# EAGLE board FuseBox.ECU_R3 (EAGLE 6.5.0)
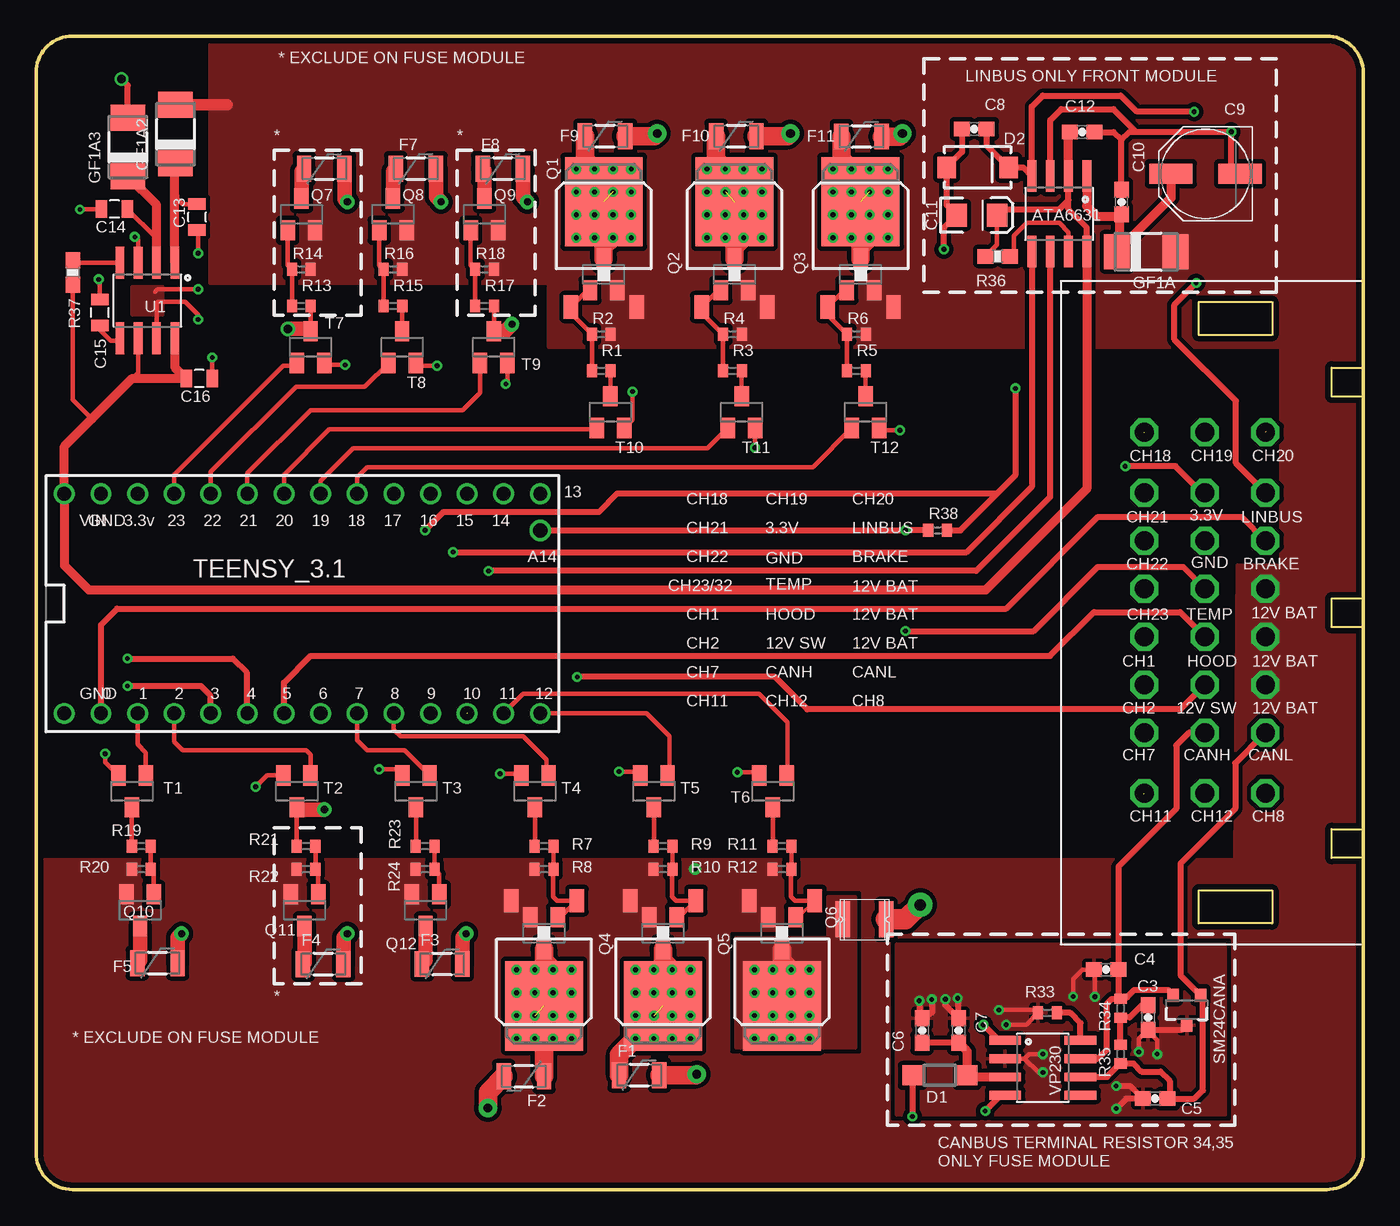
[diagram p0: board, top side]
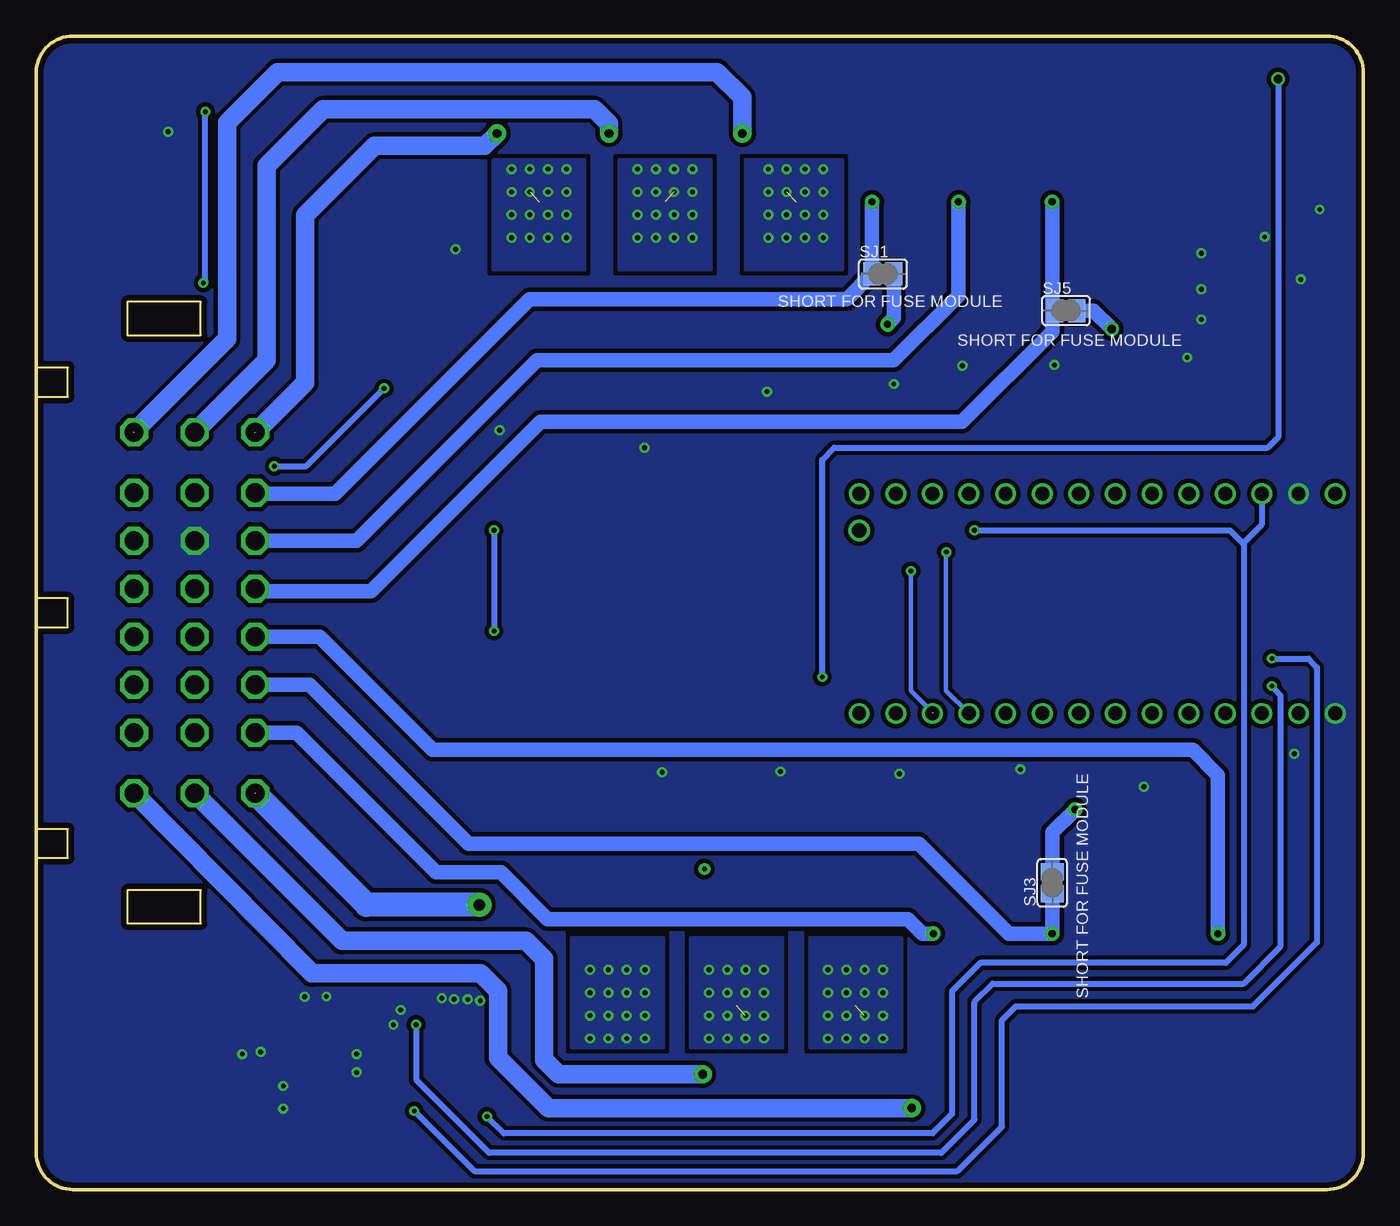
[diagram p1: board, bottom side, seen from below]

Size 92.09 x 80 mm. Coordinates in mm from the lower left corner, seen from the top.
Outline: 2.54,0 89.53,0 arc90 92.08,2.54 92.08,77.46 arc90 89.53,80 2.54,80 arc90 0,77.46 0,2.54 arc90 2.54,0
Copper layers (1*16): Top 0.0356mm / dielectric 1.5011mm / Bottom 0.0356mm
Design rules "oshpark-2layer": minimum track width 6mil, minimum drill 13mil, track to track 6mil, track to pad 6mil, pad to pad 6mil, via to via 6mil, smd to smd 6mil, copper to edge 15mil, drill to drill 6mil, minimum pad ring 7mil, minimum via ring 7mil, stop-mask expansion 2.5mil, vias tented up to drill 0mil, thermal gap 10mil
Net classes: 0 default: width 0.203 mm; 1 vcc: width 0.254 mm

## Footprints (pad centres in the part's own frame; a part is rotated, then mirrored left to right if it is on the bottom)
S08 = smd 0.61 x 2.21: 1 -3.175,-2.616; 2 -1.905,-2.616; 3 -0.635,-2.616; 4 0.635,-2.616; 5 0.635,2.616; 6 -0.635,2.616; 7 -1.905,2.616; 8 -3.175,2.616
0603-CAP = smd 1.1 x 1: 1 -0.85,0; 2 0.85,0
PANASONIC_D = smd 3 x 1.4: + 2.4,0; - -2.4,0
EIA3216 = smd 1.4 x 1.6: A 1.4,0; C -1.4,0
0805 = smd 0.8 x 1.2: 1 -0.9,0; 2 0.9,0
SOD123 = smd 1.4 x 1.4: A 1.9,0; C -1.9,0
SMA-DIODE = smd 1.27 x 1.47: A -2.15,0; C 2.15,0
PTC-1206 = smd 1 x 1.8: 1 -1.4,0; 2 1.4,0
DO-214AC = smd 1.8 x 2.4: A 2.025,0; C -2.025,0
D-PAK_TO252AA = smd 1 x 1.6: 1 -2.28,-4.8; 3 2.28,-4.8 | smd 5.4 x 6.2: 4 0,2.5
SOT23 = smd 1 x 1.4: 1 -0.95,-1.1; 2 0.95,-1.1; 3 0,1.1
R0402 = smd 0.7 x 0.9: 1 -0.65,0; 2 0.65,0
0603-RES = smd 1.1 x 1: 1 -0.85,0; 2 0.85,0
SJ = smd 1.168 x 1.6: 1 -0.762,0; 2 0.762,0
SOT23-3 = smd 0.8 x 0.9: 1 -0.95,-1; 2 0.95,-1; 3 0,1.1
TEENSY_3.0-3.2&LC_DIL = drill 0.965: 0 -7.62,13.97; 1 -7.62,11.43; 2 -7.62,8.89; 3 -7.62,6.35; 3.3V 7.62,11.43; 4 -7.62,3.81; 5 -7.62,1.27; 6 -7.62,-1.27; 7 -7.62,-3.81; 8 -7.62,-6.35; 9 -7.62,-8.89; 10 -7.62,-11.43; 11 -7.62,-13.97; 12 -7.62,-16.51; 13 7.62,-16.51; 14/A0 7.62,-13.97; 15/A1 7.62,-11.43; 16/A2 7.62,-8.89; 17/A3 7.62,-6.35; 18/A4 7.62,-3.81; 19/A5 7.62,-1.27; 20/A6 7.62,1.27; 21/A7 7.62,3.81; 22/A8 7.62,6.35; 23/A9 7.62,8.89; AGND 7.62,13.97; GND -7.62,16.51; VIN 7.62,16.51
SO08 = smd 0.61 x 2.21: 1 -1.905,-2.616; 2 -0.635,-2.616; 3 0.635,-2.616; 4 1.905,-2.616; 5 1.905,2.616; 6 0.635,2.616; 7 -0.635,2.616; 8 -1.905,2.616
1210 = smd 1 x 2.5: P$1 -1.5,0; P$2 1.5,0
HCCPHPE24BKA90F = drill 1.3 octagon: P$1 -12.515,-4.2; P$2 -8.325,-4.2; P$3 -4.995,-4.2; P$4 -1.665,-4.2; P$5 1.665,-4.2; P$6 4.995,-4.2; P$7 8.325,-4.2; P$8 12.515,-4.2; P$9 -12.515,0; P$10 -8.325,0; P$11 -4.995,0; P$12 -1.665,0; P$13 1.665,0; P$14 4.995,0; P$15 8.325,0; P$16 12.515,0; P$17 -12.515,4.2; P$18 -8.325,4.2; P$19 -4.995,4.2; P$20 -1.665,4.2; P$21 1.665,4.2; P$22 4.995,4.2; P$23 8.325,4.2; P$24 12.515,4.2

## Placement (x,y rotation side)
ATA6631  ATA6631  [S08]  69.72,67.67 180 top
C3  4.7nf  [0603-CAP]  77.15,11.94 270 top
C4  82pf  [0603-CAP]  74.24,15.26 180 top
C5  82pf  [0603-CAP]  77.65,6.3 0 top
C6  0.1uF  [0603-CAP]  61.47,11.03 270 top
C7  1uF  [0603-CAP]  64.01,11.03 270 top
C8  220pF  [0603-CAP]  65.09,73.56 180 top
C9  22uF 50v  [PANASONIC_D]  81.14,70.44 180 top
C10  100nF  [0603-CAP]  75.3,68.48 90 top
C11  10uF 16V  [EIA3216]  65.28,67.58 0 top
C12  100nF  [0603-CAP]  72.58,73.34 0 top
C13  1uF  [0805]  11.17,67.45 90 top
C14  1uF  [0805]  5.44,68 180 top
C15  1nF  [0805]  4.42,60.83 90 top
C16  4.7uF  [0805]  11.32,56.25 180 top
D1  MBR0520LT  [SOD123]  62.7,7.92 180 top
D2  SMAJ30CAHE3  [SMA-DIODE]  65.33,70.89 0 top
F1  PTCSMD  [PTC-1206]  41.85,7.94 0 top
F2  PTCSMD  [PTC-1206]  33.84,7.85 180 top
F3  PTCSMD  [PTC-1206]  28.18,15.64 0 top
F4  PTCSMD  [PTC-1206]  19.93,15.64 0 top
F5  PTCSMD  [PTC-1206]  8.43,15.71 0 top
F6  PTCSMD  [PTC-1206]  20,70.8 0 top
F7  PTCSMD  [PTC-1206]  26.35,70.8 0 top
F8  PTCSMD  [PTC-1206]  32.38,70.8 0 top
F9  PTCSMD  [PTC-1206]  39.48,73.05 0 top
F10  PTCSMD  [PTC-1206]  48.59,73.05 0 top
F11  PTCSMD  [PTC-1206]  57.27,73.03 0 top
GF1A  1A_50V  [DO-214AC]  77.03,65.04 0 top
GF1A2  1A_50V  [DO-214AC]  9.68,73.2 90 top
GF1A3  1A_50V  [DO-214AC]  6.38,72.3 90 top
Q1  IRFR5305  [D-PAK_TO252AA]  39.39,66.01 0 top
Q2  IRFR5305  [D-PAK_TO252AA]  48.46,66.01 0 top
Q3  IRFR5305  [D-PAK_TO252AA]  57.2,66.01 0 top
Q4  IRFR5305  [D-PAK_TO252AA]  35.24,15.24 180 top
Q5  IRFR5305  [D-PAK_TO252AA]  43.5,15.24 180 top
Q6  IRFR5305  [D-PAK_TO252AA]  51.75,15.24 180 top
Q7  [SOT23]  18.41,67.63 0 top
Q8  [SOT23]  24.77,67.63 0 top
Q9  [SOT23]  31.11,67.63 0 top
Q10  [SOT23]  7.22,19.37 180 top
Q11  [SOT23]  18.62,19.37 180 top
Q12  [SOT23]  27.02,19.37 180 top
Q13  [SOT23]  39.39,63.47 0 top
Q14  [SOT23]  43.5,17.78 180 top
Q15  [SOT23]  48.46,63.47 0 top
Q16  [SOT23]  57.2,63.47 0 top
Q17  [SOT23]  35.24,17.78 180 top
Q18  [SOT23]  51.75,17.78 180 top
R1  10k  [R0402]  39.22,56.78 180 top
R2  100k  [R0402]  39.22,59.32 0 top
R3  10k  [R0402]  48.31,56.78 180 top
R4  100k  [R0402]  48.31,59.32 0 top
R5  10k  [R0402]  56.91,56.78 180 top
R6  100k  [R0402]  56.91,59.32 0 top
R7  10k  [R0402]  35.24,23.81 0 top
R8  100k  [R0402]  35.24,22.23 180 top
R9  10k  [R0402]  43.5,23.81 0 top
R10  100k  [R0402]  43.5,22.23 180 top
R11  10k  [R0402]  51.75,23.81 0 top
R12  100k  [R0402]  51.75,22.23 180 top
R13  10k  [R0402]  18.41,61.28 180 top
R14  100k  [R0402]  18.41,63.82 0 top
R15  10k  [R0402]  24.77,61.28 180 top
R16  100k  [R0402]  24.77,63.82 0 top
R17  10k  [R0402]  31.11,61.28 180 top
R18  100k  [R0402]  31.11,63.82 0 top
R19  10k  [R0402]  7.3,23.81 0 top
R20  100k  [R0402]  7.3,22.23 180 top
R21  10k  [R0402]  18.73,23.81 0 top
R22  100k  [R0402]  18.73,22.23 180 top
R23  10k  [R0402]  26.99,23.81 0 top
R24  100k  [R0402]  26.99,22.23 180 top
R33  100k  [R0402]  70.17,12.25 0 top
R34  60  [R0402]  75.25,12.57 90 top
R35  60  [R0402]  75.25,9.39 90 top
R36  10k  [0603-RES]  66.72,64.72 0 top
R37  10k  [0603-RES]  2.55,63.6 270 top
R38  10k  [R0402]  62.55,45.72 0 top
SJ1  [SJ]  33.34,63.5 0 bottom
SJ3  [SJ]  21.59,21.27 90 bottom
SJ5  [SJ]  20.64,60.96 0 bottom
SM24CANA  SM24CANA-02HTG  [SOT23-3]  79.83,12.48 180 top
T1  LMUN2211LT1G  [SOT23]  6.67,27.62 180 top
T2  LMUN2211LT1G  [SOT23]  18.1,27.62 180 top
T3  LMUN2211LT1G  [SOT23]  26.35,27.62 180 top
T4  LMUN2211LT1G  [SOT23]  34.61,27.62 180 top
T5  LMUN2211LT1G  [SOT23]  42.86,27.62 180 top
T6  LMUN2211LT1G  [SOT23]  51.12,27.62 180 top
T7  LMUN2211LT1G  [SOT23]  19.05,58.42 0 top
T8  LMUN2211LT1G  [SOT23]  25.4,58.42 0 top
T9  LMUN2211LT1G  [SOT23]  31.75,58.42 0 top
T10  LMUN2211LT1G  [SOT23]  39.85,53.92 0 top
T11  LMUN2211LT1G  [SOT23]  48.95,53.92 0 top
T12  LMUN2211LT1G  [SOT23]  57.55,53.92 0 top
TEENSY_3.1  TEENSY_3.1-3.2_DIL  [TEENSY_3.0-3.2&LC_DIL]  18.48,40.64 90 top
U1  MAX16910  [SO08]  7.72,61.65 180 top
U$2  RESETTABLE_1210  [1210]  57.47,18.73 0 top
U$3  HCCPHPE24BKA90F  [HCCPHPE24BKA90F]  81.09,40 90 top
VP230  UP230  [SO08]  69.85,8.44 270 top

## Library data of the parts
ATA6631 = my-library
C3-C10 C12 = SparkFun-Capacitors
C11 C13-C16 R36 R37 = SparkFun
D1 GF1A GF1A2 GF1A3 = diode
D2 SM24CANA = SparkFun-DiscreteSemi
F1-F11 = SparkFun-PowerIC; PROD_ID: RES-11150
Q1-Q6 = transistor-power
Q7-Q18 = semicon-smd-ipc
R1-R24 R33-R35 R38 = resistor
SJ1 SJ3 SJ5 = jumper
T1-T12 = transistor
TEENSY_3.1 = Teensy_3_and_LC_Series_Boards_v1.4
U1 = SparkFun-AnalogIC; PROD_ID: IC-10141
U$2 = Simplex-Fuses
U$3 = FCI_By_element14_Batch_1
VP230 = smd-footprints

## Nets
0: TEENSY_3.1.0 U$3.P$6
1: T1.1 TEENSY_3.1.1
2: T2.1 TEENSY_3.1.2
3: TEENSY_3.1.3 VP230.1
3.3V: D1.A R38.2 TEENSY_3.1.3.3V U$3.P$15
4: TEENSY_3.1.4 VP230.4
5: TEENSY_3.1.5 U$3.P$12
5V: ATA6631.2 ATA6631.8 C11.A C12.1 C16.2 R36.1 R37.2 TEENSY_3.1.VIN U1.6 U1.8
6: TEENSY_3.1.6
7: T3.1 TEENSY_3.1.7
8: T4.1 TEENSY_3.1.8
9: ATA6631.5 TEENSY_3.1.9
10: ATA6631.6 TEENSY_3.1.10
11: T6.1 TEENSY_3.1.11
12: T5.1 TEENSY_3.1.12
12ACC: GF1A3.A U$3.P$11
12V: GF1A2.A GF1A.A Q1.3 Q2.3 Q3.3 Q4.3 Q5.3 Q6.3 Q7.2 Q8.2 Q9.2 Q10.2 Q11.2 Q12.2 Q13.2 Q14.2 Q15.2 Q16.2 Q17.2 Q18.2 R2.2 R4.2 R6.2 R8.2 R10.2 R12.2 R14.2 R16.2 R18.2 R20.2 R22.2 R24.2 U$3.P$3 U$3.P$4 U$3.P$5
13: TEENSY_3.1.13
14: TEENSY_3.1.14/A0
15: TEENSY_3.1.15/A1
16: TEENSY_3.1.16/A2
17: TEENSY_3.1.17/A3
18: T12.1 TEENSY_3.1.18/A4
19: T11.1 TEENSY_3.1.19/A5
20: T10.1 TEENSY_3.1.20/A6
21: T9.1 TEENSY_3.1.21/A7
22: T8.1 TEENSY_3.1.22/A8
23: T7.1 TEENSY_3.1.23/A9
CANH: C4.1 R34.2 SM24CANA.2 U$3.P$10 VP230.7
CANL: C5.2 R35.1 SM24CANA.1 U$3.P$2 VP230.6
CH2: F1.1 Q5.4 Q14.3
CH5: F2.1 Q4.4 Q17.3
CH6: Q6.4 Q18.3 U$2.P$1
CH7: F6.1 Q7.3
CH8: F7.1 Q8.3
CH9: F8.1 Q9.3
FUSE1: F5.2 U$3.P$20
FUSE2: F1.2 U$3.P$9
FUSE3: F4.2 SJ3.1 U$3.P$19
FUSE4: F3.2 U$3.P$18
FUSE5: F2.2 U$3.P$1
FUSE6: U$2.P$2 U$3.P$17
FUSE7: F6.2 SJ5.1 U$3.P$21
FUSE8: F7.2 U$3.P$22
FUSE9: F8.2 SJ1.1 U$3.P$23
FUSE10: F9.2 U$3.P$8
FUSE11: F10.2 U$3.P$16
FUSE12: F11.2 U$3.P$24
GND: ATA6631.3 C3.2 C4.2 C5.1 C6.1 C7.1 C8.2 C9.- C10.2 C11.C C12.2 C13.1 C14.2 C15.2 C16.1 D2.A R33.1 SM24CANA.3 T1.2 T2.2 T3.2 T4.2 T5.2 T6.2 T7.2 T8.2 T9.2 T10.2 T11.2 T12.2 TEENSY_3.1.AGND TEENSY_3.1.GND U1.3 U1.7 U$3.P$14 VP230.2
LINBUS: ATA6631.4 C8.1 D2.C U$3.P$7
N$1: C6.2 C7.2 D1.C VP230.3
N$2: F9.1 Q1.4 Q13.3
N$3: R15.1 T8.3
N$4: Q8.1 R15.2 R16.1
N$5: R13.1 SJ5.2 T7.3
N$6: Q7.1 R13.2 R14.1
N$7: C13.2 GF1A2.C U1.1
N$8: R17.1 SJ1.2 T9.3
N$10: F10.1 Q2.4 Q15.3
N$11: F11.1 Q3.4 Q16.3
N$12: C14.1 GF1A3.C U1.2
N$16: Q9.1 R17.2 R18.1
N$18: R1.1 T10.3
N$19: Q1.1 Q13.1 R1.2 R2.1
N$20: R11.1 T6.3
N$21: Q6.1 Q18.1 R11.2 R12.1
N$22: F5.1 Q10.3
N$23: F4.1 Q11.3
N$24: R3.1 T11.3
N$25: Q2.1 Q15.1 R3.2 R4.1
N$26: F3.1 Q12.3
N$27: R23.1 T3.3
N$28: Q12.1 R23.2 R24.1
N$30: R37.1 U1.4
N$31: R7.1 T4.3
N$32: Q4.1 Q17.1 R7.2 R8.1
N$34: C15.1 U1.5
N$39: R5.1 T12.3
N$40: Q3.1 Q16.1 R5.2 R6.1
N$43: R21.1 SJ3.2 T2.3
N$44: Q11.1 R21.2 R22.1
N$45: R19.1 T1.3
N$46: Q10.1 R19.2 R20.1
N$47: R9.1 T5.3
N$48: Q5.1 Q14.1 R9.2 R10.1
N$52: R33.2 VP230.8
N$54: ATA6631.1 C9.+ C10.1 GF1A.C
N$55: ATA6631.7 R36.2
N$56: C3.1 R34.1 R35.2
TEMP: R38.1 U$3.P$13

## Tracks (layer width: path | path; a pad name or v marks a point on that pad's centre or on a via)
0
  Top 0.406: TEENSY_3.1.0 4.5,39.16 5.63,40.28 67.31,40.28 73.68,46.65 83.64,46.65 U$3.P$6
1
  Top 0.305: TEENSY_3.1.1 7.04,30.87 7.62,30.3 T1.1 7.79,28.89
2
  Top 0.305: TEENSY_3.1.2 9.59,31.05 10.16,30.48 18.73,30.48 19.05,30.16 T2.1
  Top 0.406: 19.07,28.74 T2.1
3  (via drill 0.33)
  Top 0.406: VP230.1 66.81,10.35 v65.72,11.43 | v6.35,34.92 11.43,34.92 12.06,34.29 12.06,33.08 TEENSY_3.1.3
  Bottom 0.406: v65.72,11.43 65.72,7.62 60.65,2.55 29.3,2.55 26.99,4.86 26.99,13.02 25.72,14.29 8.31,14.29 5.78,16.83 5.78,34.29 v6.35,34.92
3.3V  (via drill 0.33)  (1 unrouted)
  Top 0.406: D1.A v60.8,5.07 | U$3.P$15 80.9,48.33 79.06,50.16 v75.56,50.16 | v67.94,55.56 67.94,49.53 66.67,48.26 | 66.67,48.26 40.32,48.26 39.05,46.99 28.26,46.99 v26.99,45.72 | R38.2 64.14,45.72 66.67,48.26
  Bottom 0.406: 8.31,44.77 8.31,44.87 7.06,46.12 7.06,48.24 | 8.31,44.77 8.31,16.96 9.56,15.72 26.59,15.72 28.55,13.76 28.55,5.24 29.89,3.9 59.63,3.9 v60.8,5.07 | v75.56,50.16 73.34,50.16 v67.94,55.56 | v26.99,45.72 9.27,45.72 8.31,44.77
4  (via drill 0.33)
  Top 0.406: TEENSY_3.1.4 14.61,33.08 14.61,35.88 13.65,36.83 v6.35,36.83 | v65.86,5.45 66.94,6.54 VP230.4
  Bottom 0.406: v65.86,5.45 61.67,1.27 28.18,1.27 25.08,4.36 25.08,11.75 24.13,12.7 7.67,12.7 3.23,17.14 3.23,36.2 3.81,36.83 v6.35,36.83
5
  Top 0.406: TEENSY_3.1.5 17.2,35.16 19.05,37.01 70.35,37.01 73.39,40.05 79.38,40.05 U$3.P$12
5V
  Top 0.305: C11.A 66.68,65.53 R36.1 | U1.6 7.09,56.66 6.67,56.25 | R37.2 2.55,54.77 3.87,53.45
  Top 0.406: 71.63,68.63 70.99,67.99 67.09,67.99 C11.A | 71.63,68.63 ATA6631.2 | ATA6631.8 72.9,66.72 71.63,67.99 71.63,68.63
  Top 0.61: ATA6631.2 71.63,73.24 C12.1 | U1.8 9.63,57.05 C16.2 6.67,56.25 3.87,53.45 1.97,51.54 TEENSY_3.1.VIN 1.97,43.29 3.66,41.59 65.89,41.59 72.9,48.6 ATA6631.8
7
  Top 0.305: TEENSY_3.1.7 22.29,31.16 22.98,30.46 25.57,30.46 T3.1
8
  Top 0.305: TEENSY_3.1.8 24.82,31.89 25.28,31.44 33.79,31.44 35.43,29.8 35.43,28.85
  Top 0.406: 35.43,28.85 T4.1
9  (via drill 0.33)
  Top 0.305: ATA6631.5
  Top 0.406: ATA6631.5 69.09,48.73 64.57,44.21 v28.94,44.21
  Bottom 0.305: TEENSY_3.1.9 28.95,34.61 28.95,44.2 v28.94,44.21
10  (via drill 0.33)  (1 unrouted)
  Top 0.305: 70.34,65.05 ATA6631.6
  Top 0.406: 70.34,65.05 70.34,48.02 65.23,42.9 v31.39,42.9
  Bottom 0.305: 29.86,33.06 31.39,34.59 v31.39,42.9
11
  Top 0.305: TEENSY_3.1.11 32.45,33.04 33.79,34.39 50.17,34.39 52.13,32.42 52.13,28.79
  Top 0.406: 52.13,28.79 T6.1
12
  Top 0.305: TEENSY_3.1.12 42.37,33.02 43.95,31.44 43.95,28.86
  Top 0.406: 43.95,28.86 T5.1
12ACC  (via drill 0.33, 0.6)
  Top 0.406: U$3.P$11 79.39,33.3 53.52,33.3 51.27,35.55 v37.55,35.55 | GF1A3.A 6.38,76.58 v5.92,77.03
  Bottom 0.406: v37.55,35.55 37.55,50.62 36.72,51.45 6.65,51.45 5.92,52.18 v5.92,77.03
12V  (via drill 0.33 pad 0.81)
  Top 0.813: GF1A2.A 13.24,75.22
  other vias: 45.72,22.23
  pour Top (isolate 0.305, no thermals): 12.06,62.87 35.56,62.87 35.56,58.42 92.08,58.42 92.08,77.47 arc90 89.53,80.01 12.06,80.01
  pour Top (isolate 0.305, rank 2, no thermals): 0,22.86 57.78,22.86 57.78,0 2.54,0 arc-90 0,2.54
  pour Top (isolate 0.305, rank 2, no thermals): 83.33,43.3 86.36,43.3 86.36,59.05 92.08,59.05 92.08,2.54 arc-90 89.53,0 57.15,0 57.15,22.86 83.19,22.86
18
  Top 0.305: T12.1 53.89,50.11 22.98,50.11 22.29,49.41 TEENSY_3.1.18/A4
19
  Top 0.305: T11.1 46.6,51.42 22,51.42 19.75,49.16 TEENSY_3.1.19/A5
20
  Top 0.305: TEENSY_3.1.20/A6 17.2,49.59 20.34,52.73 38.81,52.73
  Top 0.406: 38.81,52.73 T10.1
21
  Top 0.305: TEENSY_3.1.21/A7 14.66,49.67 19.04,54.04 29.59,54.04 30.8,55.24 T9.1
22
  Top 0.305: T8.1 22.8,55.67 18.03,55.67 12.12,49.77 TEENSY_3.1.22/A8
23
  Top 0.305: TEENSY_3.1.23/A9 9.59,49.59 17.14,57.15 17.93,57.15 T7.1
CANH
  Top 0.406: VP230.7 73.66,9.08 74.29,9.71 74.29,12.89 74.62,13.22 R34.2 | R34.2 75.35,13.32 75.68,13.32 76.2,13.84 78.53,13.84 SM24CANA.2 | R34.2 75.09,13.37 C4.1 75.09,22.4 79.09,26.4 79.09,30.8 79.97,31.68 U$3.P$10
CANL
  Top 0.406: VP230.6 74.31,7.81 R35.1 76.14,8.74 76.69,8.19 78,8.19 78.66,7.53 78.66,6.46 C5.2 80.38,6.3 80.95,6.88 80.95,13.31 SM24CANA.1 79.39,14.87 79.39,22.6 83.19,26.4 83.19,29.57 U$3.P$2
CH2  (via drill 0.33)  (1 unrouted)
  Top 1.27: Q14.3 43.5,15.88 v44.13,15.24 | F1.1 40.45,9.33 v41.59,10.48
  other vias: 42.86,15.24 41.59,15.24 41.59,13.65 42.86,13.65 44.13,13.65 45.4,13.65 45.4,12.06 44.13,12.06 42.86,12.06 41.59,12.06 42.86,10.48 44.13,10.48 45.4,10.48 45.4,15.24
  pour Bottom (isolate 0.254): 40.32,17.46 46.67,17.46 46.67,9.84 40.32,9.84
CH5  (via drill 0.33)  (1 unrouted)
  Top 1.27: Q17.3 35.24,15.88 v35.88,15.24 | F2.1 Q4.4
  other vias: 34.61,15.24 33.34,15.24 33.34,13.65 34.61,13.65 35.88,13.65 37.15,13.65 37.15,12.06 35.88,12.06 34.61,12.06 33.34,12.06 33.34,10.48 34.61,10.48 35.88,10.48 37.15,10.48 37.15,15.24
  pour Bottom (isolate 0.254): 32.07,17.46 38.42,17.46 38.42,9.84 32.07,9.84
CH6  (via drill 0.33)
  Top 1.27: Q18.3 51.75,15.88 v52.39,15.24
  Top 1.676: 53.11,11.98 v52.39,12.06
  Top 2.54: 53.02,13.65 52.7,13.34
  other vias: 53.66,15.24 49.85,15.24 51.12,15.24 52.39,13.65 53.66,13.65 51.12,13.65 49.85,13.65 51.12,12.06 49.85,12.06 49.85,10.48 51.12,10.48 52.39,10.48 53.66,10.48 53.66,12.06
  pour Bottom (isolate 0.254): 48.58,17.46 54.93,17.46 54.93,9.84 48.58,9.84
  pour Top (no thermals): 48.58,17.46 48.58,9.84 56.83,9.84 56.83,20.32 54.93,20.32 54.93,17.46
CH7
  Top 0.305: 18.38,68.69 Q7.3
  Top 1.016: Q7.3 18.41,70.61 F6.1
CH8
  Top 0.305: 24.73,68.69 Q8.3
  Top 1.016: Q8.3 24.77,70.61 F7.1
CH9
  Top 0.305: 31.08,68.69 Q9.3
  Top 1.016: Q9.3 31.11,70.67 F8.1
FUSE1  (via drill 0.5 pad 1.02)
  Top 0.305: 10.21,17.87 v10.1,17.75
  Top 1.016: F5.2 9.83,17.48 v10.1,17.75
  Bottom 1.016: U$3.P$20 72.43,38.34 64.59,30.5 11.85,30.5 10.1,28.75 v10.1,17.75
FUSE2  (via drill 0.6 pad 1.27)
  Top 0.305: 45.35,7.5 v45.84,8
  Top 1.27: F1.2 45.78,7.94 v45.84,8
  Bottom 1.27: v45.84,8 55.84,8 56.84,9 56.84,16 58.09,17.25 70.86,17.25 U$3.P$9
FUSE3  (via drill 0.5 pad 1.02)
  Top 0.305: 21.68,17.83 v21.59,17.75
  Top 1.016: F4.2 21.33,17.48 v21.59,17.75
  Bottom 1.016: U$3.P$19 73.1,35.01 62.09,24 30.84,24 24.59,17.75 v21.59,17.75 SJ3.1
FUSE4  (via drill 0.5 pad 1.02)
  Top 0.305: 29.86,17.77 v29.84,17.75
  Top 1.016: F3.2 29.58,17.48 v29.84,17.75
  Bottom 1.016: v29.84,17.75 30.59,17.75 31.59,18.75 56.59,18.75 59.84,22 64.34,22 74.02,31.68 U$3.P$18
FUSE5  (via drill 0.6 pad 1.27)
  Top 1.27: v31.34,5.65 31.34,6.75 F2.2
  Bottom 1.27: U$3.P$1 73.06,15.1 72.96,15 61.24,15 60.05,13.8 60.05,9.15 56.55,5.65 v31.34,5.65
FUSE6  (via drill 0.8 pad 1.68)  (1 unrouted)
  Top 0.305: 61.63,20.04 v61.34,19.75
  Top 1.422: U$2.P$2 60.33,18.73 v61.34,19.75
  Bottom 1.422: 69.16,19.75
  Bottom 1.676: v61.34,19.75 69.16,19.75 | 76.84,27.43 69.16,19.75
FUSE7  (via drill 0.5 pad 1.02)
  Top 0.305: 21.35,68.25 v21.59,68.5
  Top 1.016: F6.2 21.4,68.69 v21.59,68.5
  Bottom 1.016: U$3.P$21 76.73,41.5 68.84,41.5 57.09,53.25 27.84,53.25 21.59,59.5 21.59,60.76 SJ5.1 21.59,61.16 v21.59,68.5
FUSE8  (via drill 0.5 pad 1.02)
  Top 0.305: 28.23,68.37 v28.09,68.5
  Top 1.016: F7.2 27.75,68.84 v28.09,68.5
  Bottom 1.016: U$3.P$22 69.84,45 57.34,57.5 32.59,57.5 28.09,62 v28.09,68.5
FUSE9  (via drill 0.5 pad 1.02)
  Top 0.305: 34.12,68.47 v34.09,68.5
  Top 1.016: F8.2 33.78,68.81 v34.09,68.5
  Bottom 1.016: U$3.P$23 76.82,48.25 71.34,48.25 57.84,61.75 35.84,61.75 35.84,61.76 SJ1.1 v34.09,68.5
FUSE10  (via drill 0.6 pad 1.27)  (1 unrouted)
  Top 1.27: F9.2 42.9,73.05 v43.09,73.25
  Bottom 1.27: v43.09,73.25 43.09,75.75 44.84,77.5 75.34,77.5 78.84,74 78.84,59 85.28,52.56 85.34,52.56
FUSE11  (via drill 0.6 pad 1.27)
  Top 1.27: F10.2 52.15,73.05 v52.34,73.25
  Bottom 1.27: v52.34,73.25 52.34,73.92 53.34,74.92 72.19,74.92 76.09,71.01 76.09,57.52 U$3.P$16
FUSE12  (via drill 0.6 pad 1.27)  (1 unrouted)
  Top 0.305: 59.99,73.37 v60.11,73.25
  Top 1.27: F11.2 59.9,73.03 v60.11,73.25
  Bottom 1.27: 76.88,52.5 73.42,55.96 73.42,67.57 68.61,72.38 60.98,72.38 v60.11,73.24 v60.11,73.25
GND  (via drill 0.33)
  Top 0.305: VP230.2 68.58,9.08 | 68.58,9.08 68.89,9.39 v69.85,9.39 | v69.85,8.12 69.53,8.12 68.58,9.08 | v77.78,9.39 77.78,10.35 77.15,10.98 C3.2 76.52,10.45 v76.52,9.54 | 73.15,15.5 C4.2 | v66.81,12.46 69.31,12.46 R33.1 68.7,11.44 v67.31,11.44 | T2.2 16.02,28.72 v15.24,27.94 | v71.95,13.39 71.95,14.61 72.59,15.25 C4.2 | v73.45,13.37 73.45,15.2 C4.2 | v4.79,30.23 4.79,29.65 T1.2 | v59.93,52.66 58.5,52.66 T12.2 | 49.9,52.64 T11.2 49.88,52.8 v49.88,51.44 | 40.8,52.64 T10.2 41.38,53.4 v41.38,55.34 | 32.7,57.14 T9.2 32.7,55.98 v32.59,55.87 | v27.82,57.14 26.35,57.14 T8.2 | v21.45,57.19 20,57.19 T7.2 | v40.45,28.99 41.65,28.99 T5.2 | v48.66,28.94 49.95,28.94 T6.2 | v23.8,29.14 24.98,29.14 T3.2 | v32.2,28.84 33.54,28.84 T4.2 | C16.1 12.22,56.74 v12.23,57.7 | C15.2 4.42,63.05 v4.36,63.12 | v11.26,62.45 8.45,62.45 8.25,62.25 | v11.26,60.34 11.26,60.67 10.35,61.58 8.47,61.58 8.32,61.42 8.36,61.39 U1.7 | C14.2 4.51,67.97 v3.04,67.97 | U1.3 7.09,65.83 v6.86,66.07 | v11.24,64.94 11.24,66.48
  Top 0.406: 20.07,57.25 T7.2 | 26.42,57.25 T8.2 | 32.77,57.25 T9.2 | 40.87,52.75 T10.2 | 49.97,52.75 T11.2 | 66.84,12.49 v66.81,12.46 | v61.27,13.09 61.27,12.04 61.38,11.95 61.62,11.95 | ATA6631.3 70.36,74.17 71.12,74.93 74.75,74.93 76.32,73.36 | v62.15,13.19 62.15,12.23 C6.1 | v63.94,13.27 63.94,11.95 C7.1 63.09,12.8 v63.09,13.21 | C8.2 64.25,71.96 D2.A 63.17,68.28 C11.C 62.99,66.69 v62.99,65.21 | C12.2 74.75,73.34 75.3,72.79 | C10.2 75.3,72.79 | v74.94,5.62 75.63,6.3 C5.1 75.92,7.18 v74.94,7.18 | 76.32,73.36 v82.92,73.36 82.92,71.06 C9.- | 75.3,72.79 75.87,73.36 76.32,73.36 | C3.2 79.54,11.09 SM24CANA.3
  Top 0.61: 11.24,66.48 C13.1
  pour Bottom (isolate 0.305, rank 2, no thermals): 0,77.46 0,2.54 arc90 2.54,0 89.56,0 arc90 92.09,2.54 92.09,77.46 arc90 89.56,80 2.54,80 arc90
  pour Top (isolate 0.305): 59.7,5.2 82.5,5.2 82.5,17 59.7,17
  pour Top: 8.78,62.62 8.78,60.67 6.67,60.67 6.67,62.62
LINBUS  (via drill 0.33)
  Top 0.406: C8.1 65.94,72.42 D2.C 68.49,70.89 ATA6631.4 69.09,75.11 69.85,75.87 75.26,75.87 76.38,74.75 v80.34,74.75 | U$3.P$7 83.25,50.38 83.25,54.69 78.99,58.95 78.99,61.38 v80.49,62.88
  Bottom 0.406: v80.34,74.75 80.34,63.02 v80.49,62.88
N$1
  Top 0.406: 64.11,10.08 C7.2 C6.2 | VP230.3
  Top 0.61: VP230.3 64.72,7.8 D1.C 64.6,9.59 C7.2
N$2  (via drill 0.33)  (1 unrouted)
  Top 1.27: F9.1 38.09,71.44 v38.75,70.77 | Q13.3 39.39,65.38 v40.02,66.01
  other vias: 41.29,66.01 38.75,66.01 41.29,67.6 40.02,67.6 38.75,67.6 37.48,67.6 37.48,69.19 38.75,69.19 40.02,69.19 41.29,69.19 41.29,70.77 40.02,70.77 37.48,70.77 37.48,66.01
  pour Bottom: 42.88,63.79 36.15,63.79 36.15,71.41 42.88,71.41
N$3
  Top 0.305: T8.3 25.4,61.26 R15.1
N$4
  Top 0.305: R15.2 R16.1 23.82,64.12 Q8.1
N$5  (via drill 0.6 pad 1.02)
  Top 0.305: T7.3 19.05,61.26 R13.1
  Top 1.016: v17.46,59.69 18.88,59.69 T7.3
  Bottom 1.016: SJ5.2 18.73,60.96 v17.46,59.69
N$6
  Top 0.305: R13.2 R14.1 17.46,64.12 Q7.1
N$7
  Top 0.305: C13.2 10.18,68.35 9.63,68.9
  Top 0.61: U1.1 9.63,68.9 9.63,71.13 GF1A2.C
N$8  (via drill 0.5 pad 1.02)
  Top 0.305: 31.75,61.26 R17.1 31.77,59.53 T9.3
  Top 1.016: T9.3 32.53,59.52 v33.02,60.01
  Bottom 1.016: SJ1.2 32.58,60.45 v33.02,60.01
N$10  (via drill 0.33)  (1 unrouted)
  Top 1.27: F10.1 47.19,71.41 v47.82,70.77 | Q15.3 48.46,65.38 v49.09,66.01
  other vias: 50.36,66.01 46.55,66.01 47.82,66.01 50.36,67.6 49.09,67.6 47.82,67.6 46.55,67.6 50.36,69.19 49.09,69.19 47.82,69.19 46.55,69.19 46.55,70.77 49.09,70.77 50.36,70.77
  pour Bottom (isolate 0.254): 51.63,63.79 45.28,63.79 45.28,71.41 51.63,71.41
N$11  (via drill 0.33)  (1 unrouted)
  Top 1.27: F11.1 55.87,71.47 v56.57,70.77 | Q16.3 57.2,65.38 v57.84,66.01
  other vias: 56.57,66.01 59.11,66.01 59.11,67.6 57.84,67.6 56.57,67.6 55.3,67.6 55.3,69.19 56.57,69.19 57.84,69.19 59.11,69.19 59.11,70.77 57.84,70.77 55.3,70.77 55.3,66.01
  pour Bottom (isolate 0.254): 60.38,63.79 54.03,63.79 54.03,71.41 60.38,71.41
N$12
  Top 0.305: C14.1 8.3,66.04 8.36,66.04
  Top 0.61: U1.2 8.36,66.04 8.36,68.29 GF1A3.C
N$16
  Top 0.305: R17.2 R18.1 30.16,64.12 Q9.1
N$18
  Top 0.305: T10.3 39.85,56.76 R1.1
N$19
  Top 0.305: R1.2 R2.1 37.11,60.77 Q1.1 38.27,62.37 Q13.1
N$20
  Top 0.305: T6.3 51.12,23.83 R11.1
N$21
  Top 0.254: Q18.1 52.87,18.88 Q6.1
  Top 0.305: R11.2 R12.1 52.39,22.21 52.39,20.32 52.67,20.04 Q6.1
N$22
  Top 1.016: Q10.3 7.22,15.9 F5.1
N$23
  Top 1.016: Q11.3 18.62,15.73 F4.1
N$24
  Top 0.305: T11.3 48.95,56.76 R3.1
N$25
  Top 0.305: R3.2 R4.1 46.18,60.8 Q2.1 47.34,62.37 Q15.1
N$26
  Top 1.016: Q12.3 27.02,15.89 F3.1
N$27
  Top 0.305: T3.3 26.35,23.83 R23.1
N$28
  Top 0.305: R23.2 R24.1 27.98,21.89 Q12.1
N$30
  Top 0.305: U1.4 2.73,64.27 R37.1
N$31
  Top 0.305: T4.3 34.61,23.83 R7.1
N$32
  Top 0.305: R7.2 R8.1 35.88,22.21 35.88,20.32 36.16,20.04 Q4.1 36.36,18.88 Q17.1
N$34
  Top 0.305: C15.1 4.42,59.62 5.17,58.88 5.66,58.88 U1.5
N$39
  Top 0.305: T12.3 57.55,56.76 R5.1
N$40
  Top 0.305: R5.2 R6.1 54.92,60.66 Q3.1 56.08,62.37 Q16.1
N$43  (via drill 0.5 pad 1.02)
  Top 0.305: 18.1,23.83 R21.1 18.08,26.51
  Top 0.406: 18.08,26.51 T2.3
  Top 1.016: v20,26.35 18.27,26.35 T2.3
  Bottom 1.016: SJ3.2 21.59,24.77 v20,26.35
N$44
  Top 0.305: R21.2 R22.1 19.57,22.03 Q11.1
N$45
  Top 0.305: T1.3 6.65,26.51 R19.1
N$46
  Top 0.305: R19.2 R20.1 8.18,22 Q10.1
N$47
  Top 0.305: T5.3 42.86,23.83 R9.1
N$48
  Top 0.305: R9.2 R10.1 44.13,22.21 44.13,20.32 44.41,20.04 Q5.1 44.62,18.88 Q14.1
N$52
  Top 0.406: VP230.8 72.46,11.54 71.75,12.25 R33.2
N$54
  Top 0.61: C9.+ 78.74,68.78 GF1A.C 75.17,65.21 75.17,67.5 | ATA6631.1 72.9,68.2 73.59,67.5 75.17,67.5 | 75.17,67.5 C10.1
N$55
  Top 0.305: ATA6631.7 71.63,66.41 70.99,67.04 68.74,67.04 67.85,66.16 67.85,65 R36.2
N$56
  Top 0.406: C3.1 76.73,12.79 75.88,11.94 75.26,11.94 R34.1 R35.2
TEMP  (via drill 0.33, 1)
  Top 0.406: v34.98,45.72 v60.33,45.72 R38.1 | v60.33,38.73 69.22,38.73 73.66,43.18 79.58,43.18 U$3.P$13
  Bottom 0.406: v60.33,45.72 v60.33,38.73

## Text on the board
tNames: * EXCLUDE ON FUSE MODULE | LINBUS ONLY FRONT MODULE | * | * | CH18 | CH19 | CH20 | 13 | CH18 | CH19 | CH20 | VIN | GND | 3.3v | 23 | 22 | 21 | 20 | 19 | 18 | 17 | 16 | 15 | 14 | CH21 | 3.3V | LINBUS | CH21 | 3.3V | LINBUS | A14 | CH22 | BRAKE | GND | CH22 | GND | BRAKE | CH23/32 | TEMP | 12V BAT | CH1 | HOOD | 12V BAT | CH23 | TEMP | 12V BAT | CH2 | 12V SW | 12V BAT | CH7 | CANH | CANL | CH1 | HOOD | 12V BAT | GND | 0 | 1 | 2 | 3 | 4 | 5 | 6 | 7 | 8 | 9 | 10 | 11 | 12 | CH11 | CH12 | CH8 | CH2 | 12V SW | 12V BAT | CH7 | CANH | CANL | CH11 | CH12 | CH8 | * | * EXCLUDE ON FUSE MODULE | CANBUS TERMINAL RESISTOR 34,35 | ONLY FUSE MODULE
bNames: SHORT FOR FUSE MODULE | SHORT FOR FUSE MODULE | SHORT FOR FUSE MODULE